# EAGLE board ProtoShield (EAGLE 5.01)
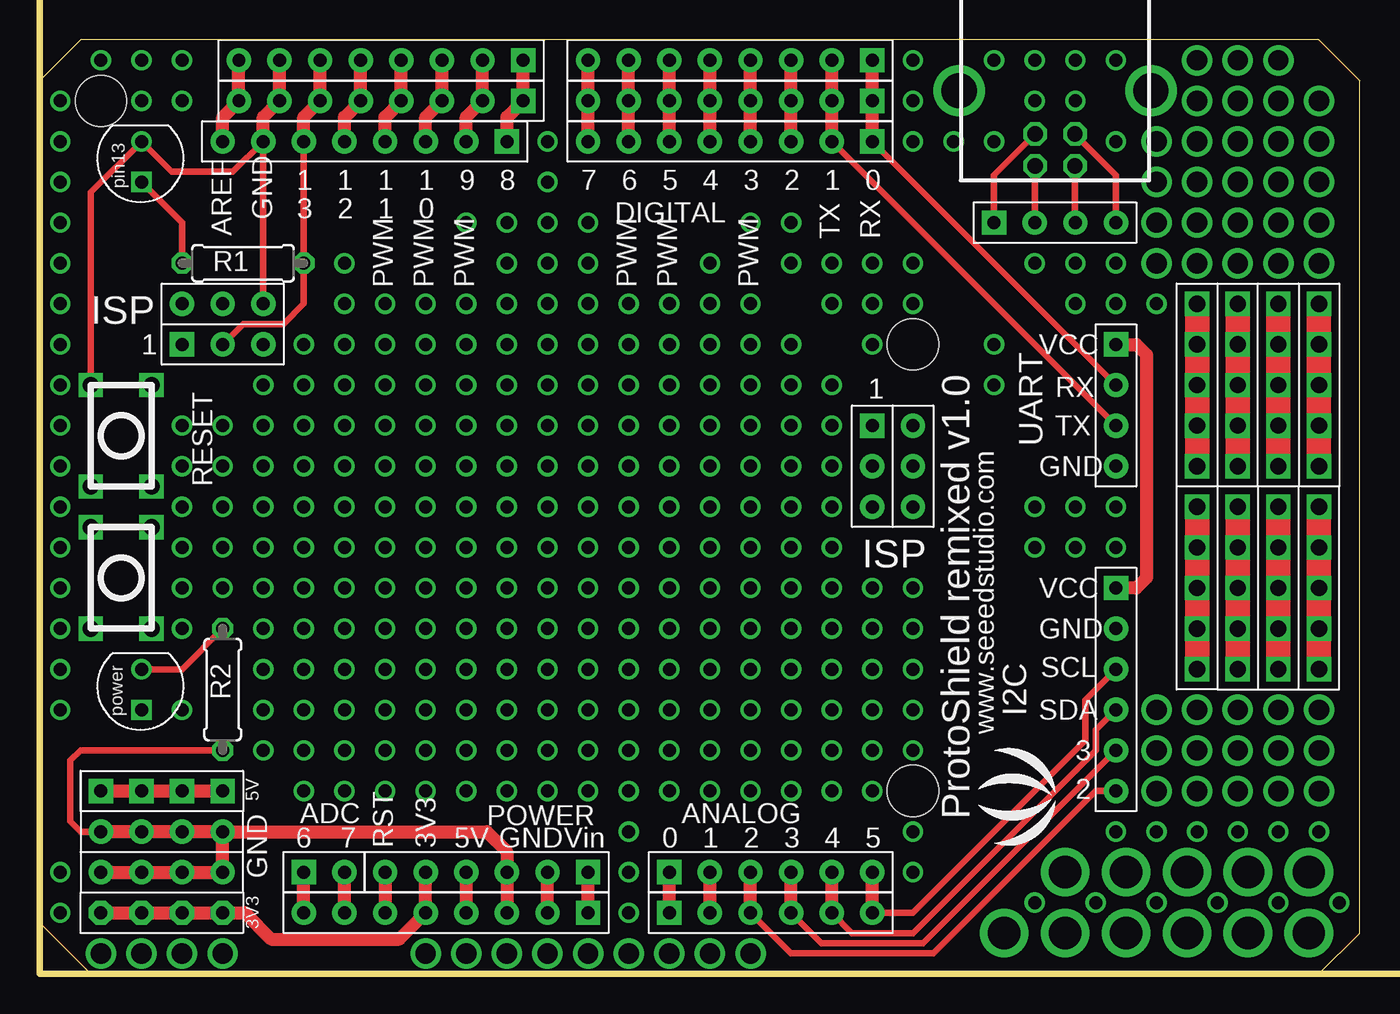
[diagram p0: board, top side]
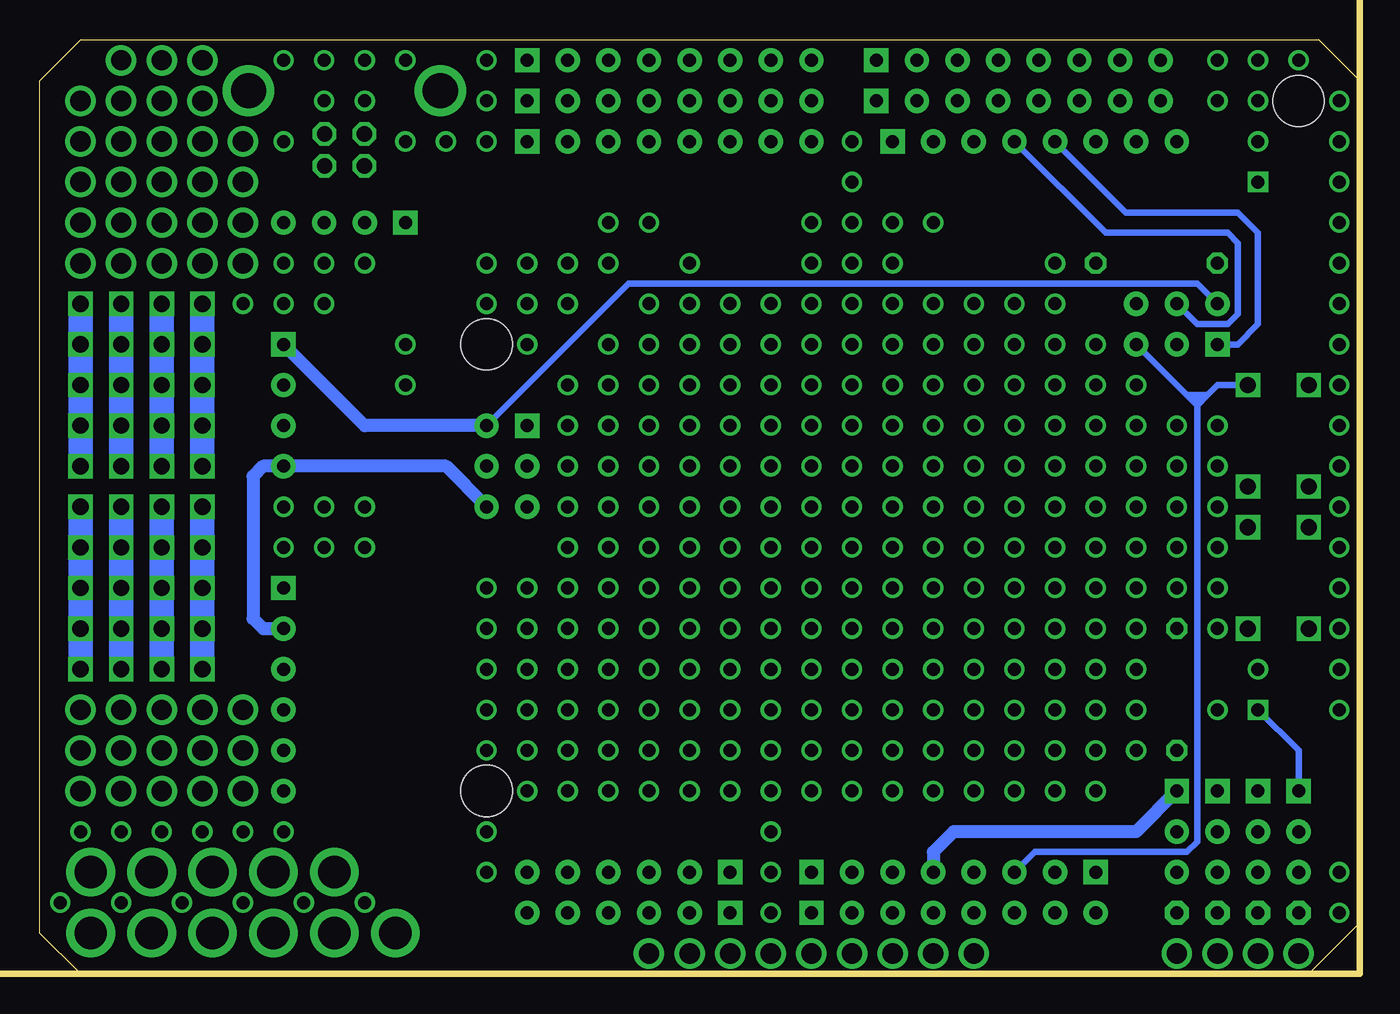
[diagram p1: board, bottom side, seen from below]

Size 82.55 x 58.42 mm. Coordinates in mm from the lower left corner, seen from the top.
Outline: 0,3.17 3.17,0 80.01,0 82.55,2.54 82.55,55.88 80.01,58.42 2.54,58.42 0,55.88 0,3.17
Copper layers (1*16): Top 0.035mm / dielectric 1.5mm / Bottom 0.035mm
Design rules "rule_manufactory *": minimum track width 0.1mm, minimum drill 0.3mm, track to track 6mil, track to pad 6mil, pad to pad 6mil, via to via 6mil, smd to smd 6mil, copper to edge 10mil, drill to drill 10mil, minimum pad ring 10mil, minimum via ring 6mil, stop-mask expansion 2mil, vias tented up to drill 25mil, thermal gap 10mil
Net classes: 0 default: width 0.003 mm, drill 0.254 mm, clearance 0.152 mm
Holes 3.2 mm at 3.81,54.61 54.61,11.43 54.61,11.43 54.61,39.37
Milling: 4 lines

## Footprints (pad centres in the part's own frame; a part is rotated, then mirrored left to right if it is on the bottom)
CK_1*2 = drill 0.813 pad 1.524 square: 1 0,1.27 | drill 0.813 pad 1.524 round: 2 0,-1.27
CK_1X4 = drill 0.813 pad 1.524 square: 1 0,3.81 | drill 0.813 pad 1.524 round: 2 0,1.27; 3 0,-1.27; 4 0,-3.81
CK_1*6 = drill 0.813 pad 1.524 square: 1 0,6.35 | drill 0.813 pad 1.524 round: 2 0,3.81; 3 0,1.27; 4 0,-1.27; 5 0,-3.81; 6 0,-6.35
CK_2X3 = drill 0.813 pad 1.524 square: 1 -1.27,2.54 | drill 0.813 pad 1.524 round: 2 -1.27,0; 3 -1.27,-2.54; 4 1.27,-2.54; 5 1.27,0; 6 1.27,2.54
CK_1X8 = drill 0.813 pad 1.524 square: 1 0,8.89 | drill 0.813 pad 1.524 round: 2 0,6.35; 3 0,3.81; 4 0,1.27; 5 0,-1.27; 6 0,-3.81; 7 0,-6.35; 8 0,-8.89
0207/7 = drill 0.813 octagon: 1 -3.81,0; 2 3.81,0
PN61729 = drill 0.95 octagon: 1 1.25,4.71; 2 -1.25,4.71; 3 -1.25,2.71; 4 1.25,2.71 | drill 2.2 round: P$1 -6,0; P$2 6,0

## Placement (x,y rotation side)
ADC6_7  CK_12  [CK_1*2]  17.78,6.35 90 top
E$1  [CK_1X4]  63.5,46.99 90 top
E$2  [LOGO_SILK]  61.85,11.05 90 top
I2C  [CK_1*6]  67.31,17.78 0 top
ISP  CK_2X3  [CK_2X3]  53.34,31.75 0 top
ISP1  CK_2X3  [CK_2X3]  11.43,40.64 90 top
PB  CK_1X8  [CK_1X8]  21.34,54.61 270 top
PB1  CK_1X8  [CK_1X8]  20.32,52.07 270 top
PB2  CK_1X8  [CK_1X8]  21.34,57.15 270 top
PC  [CK_1*6]  45.72,6.35 90 top
PC1  [CK_1*6]  45.72,3.81 90 top
PD  CK_1X8  [CK_1X8]  43.18,54.61 270 top
PD1  CK_1X8  [CK_1X8]  43.18,52.07 270 top
PD2  CK_1X8  [CK_1X8]  43.18,57.15 270 top
PD3  CK_1X8  [CK_1X8]  25.4,3.81 270 top
POWER  [CK_1*6]  27.94,6.35 270 top
R1  [0207/7]  12.7,44.45 0 top
R2  [0207/7]  11.43,17.78 90 top
UART  [CK_1X4]  67.31,35.56 0 top
X4  [PN61729]  63.5,55.24 180 top

## Library data of the parts
ADC6_7 E$1 I2C ISP ISP1 PB PB1 PB2 PC PC1 PD PD1-PD3 POWER UART = CONNECTER
E$2 = logo
R1 R2 = ref-packages
X4 = SmartPrj

## Nets
3V3: PD3.5 POWER.5
5V: PD3.4 POWER.4
---: PD3.3 POWER.3 R2.1
GND: I2C.2 ISP.4 UART.4
LED+: R1.1
LED-: ISP1.4 PB1.7 PB2.7 PB.7
LED-1: R2.2
RST: ISP1.3 PD3.6 POWER.6
RX: PD1.1 PD2.1 PD.1 UART.2
S$1: E$1.2 X4.1
S$3: I2C.5 PC1.4 PC.4
S$4: I2C.6 PC1.3 PC.3
S$168: ISP1.2 PB1.6 PB2.6 PB.6 R1.2
S$169: PC1.2 PC.2
S$170: PC1.1 PC.1
S$171: PD3.1 POWER.1
S$172: PD3.2 POWER.2
S$174: ADC6_7.1 PD3.8
S$177: ADC6_7.2 PD3.7
S$179: PD1.4 PD2.4 PD.4
S$180: PD1.3 PD2.3 PD.3
S$181: PD1.5 PD2.5 PD.5
S$182: PD1.6 PD2.6 PD.6
S$183: PD1.7 PD2.7 PD.7
S$184: PD1.8 PD2.8 PD.8
S$185: PB1.1 PB2.1 PB.1
S$186: PB1.2 PB2.2 PB.2
S$187: PB1.3 PB2.3 PB.3
S$188: ISP1.5 PB1.4 PB2.4 PB.4
S$189: ISP1.1 PB1.5 PB2.5 PB.5
S$191: PB1.8 PB2.8 PB.8
S$237: E$1.3 X4.2
S$238: E$1.1 X4.4
S$239: E$1.4 X4.3
SCL: I2C.3 PC1.6 PC.6
SDA: I2C.4 PC1.5 PC.5
TX: PD1.2 PD2.2 PD.2 UART.3
VCC: I2C.1 ISP1.6 ISP.6 UART.1

## Tracks (layer width: path | path; a pad name or v marks a point on that pad's centre or on a via)
3V3  (via drill 0.81 pad 1.52)
  Top 0.813: POWER.5 PD3.5 22.48,2.16 14.48,2.16 12.83,3.81 v11.43,3.81 v8.89,3.81 v6.35,3.81 v3.81,3.81
5V  (via drill 0.81 pad 1.27, 0.81 pad 1.52)
  Top 0.813: POWER.4 PD3.4 | v11.43,11.43 v8.89,11.43 v6.35,11.43 v3.81,11.43
  Bottom 0.406: v3.81,11.43 3.81,13.97 v6.35,16.51
  Bottom 0.813: POWER.4 26.67,7.62 25.4,8.89 13.97,8.89 v11.43,11.43
---  (via drill 0.81 pad 1.52)
  Top 0.406: v3.81,8.89 2.54,8.89 1.91,9.53 1.91,13.34 2.54,13.97 R2.1
  Top 0.813: PD3.3 POWER.3 29.21,7.62 27.94,8.89 v11.43,8.89 | v3.81,6.35 v6.35,6.35 v8.89,6.35 v11.43,6.35 v11.43,8.89 | v3.81,8.89 v6.35,8.89 v8.89,8.89 v11.43,8.89
GND
  Bottom 0.813: I2C.2 68.58,21.59 69.22,22.23 69.22,31.11 68.58,31.75 UART.4 57.15,31.75 ISP.4
LED+  (via drill 0.81 pad 1.27)
  Top 0.406: R1.1 8.89,46.99 v6.35,49.53
LED-  (via drill 0.81 pad 1.27, 1.02 pad 1.52)
  Top 0.406: 11.43,50.16 8.26,50.16 v6.35,52.07 3.17,48.9 v3.17,36.83 v3.17,30.48 | 11.43,50.16 12.06,50.16 PB1.7 ISP1.4 | 11.43,50.16 10.79,50.16
  Top 0.813: PB1.7 13.97,53.59 PB.7 PB2.7
LED-1  (via drill 0.81 pad 1.27)
  Top 0.406: v6.35,19.05 8.89,19.05 R2.2
RST  (via drill 1.02 pad 1.52)
  Top 0.406: v6.99,36.83 v6.99,30.48
  Top 0.813: POWER.6 PD3.6
  Bottom 0.406: POWER.6 20.32,7.62 10.79,7.62 10.16,8.26 10.16,35.56 | 10.16,35.56 ISP1.3 | v6.99,36.83 8.89,36.83 9.53,36.2 | 9.53,36.2 10.16,36.2 10.16,35.56 | 10.16,35.56 9.53,36.2 | 9.53,36.2 10.79,36.2 10.16,35.56
RX
  Top 0.406: PD1.1 UART.2
  Top 0.813: PD1.1 PD.1 PD2.1
S$1
  Top 0.406: X4.1 62.25,47.01 E$1.2
S$2  (via drill 0.81 pad 1.27)
  other vias: 19.05,44.45
S$3
  Top 0.406: PC1.4 48.9,1.91 55.24,1.91 I2C.5
  Top 0.813: PC1.4 PC.4
S$4
  Top 0.406: PC1.3 46.99,1.27 55.88,1.27 66.04,11.43 I2C.6
  Top 0.813: PC1.3 PC.3
S$5  (via drill 0.81 pad 1.27)
  other vias: 13.97,34.29
S$6  (via drill 0.81 pad 1.27)
  other vias: 19.05,41.91
S$7  (via drill 0.81 pad 1.27)
  other vias: 21.59,41.91
S$8  (via drill 0.81 pad 1.27)
  other vias: 24.13,41.91
S$9  (via drill 0.81 pad 1.27)
  other vias: 26.67,41.91
S$10  (via drill 0.81 pad 1.27)
  other vias: 29.21,41.91
S$11  (via drill 0.81 pad 1.27)
  other vias: 31.75,41.91
S$12  (via drill 0.81 pad 1.27)
  other vias: 34.29,41.91
S$13  (via drill 0.81 pad 1.27)
  other vias: 36.83,41.91
S$14  (via drill 0.81 pad 1.27)
  other vias: 39.37,41.91
S$15  (via drill 0.81 pad 1.27)
  other vias: 49.53,11.43
S$16  (via drill 0.81 pad 1.27)
  other vias: 44.45,41.91
S$17  (via drill 0.81 pad 1.27)
  other vias: 46.99,39.37
S$18  (via drill 0.81 pad 1.27)
  other vias: 46.99,36.83
S$19  (via drill 0.81 pad 1.27)
  other vias: 44.45,36.83
S$20  (via drill 0.81 pad 1.27)
  other vias: 41.91,36.83
S$21  (via drill 0.81 pad 1.27)
  other vias: 39.37,36.83
S$22  (via drill 0.81 pad 1.27)
  other vias: 36.83,36.83
S$23  (via drill 0.81 pad 1.27)
  other vias: 34.29,36.83
S$24  (via drill 0.81 pad 1.27)
  other vias: 31.75,36.83
S$25  (via drill 0.81 pad 1.27)
  other vias: 29.21,36.83
S$26  (via drill 0.81 pad 1.27)
  other vias: 26.67,36.83
S$27  (via drill 0.81 pad 1.27)
  other vias: 24.13,36.83
S$28  (via drill 0.81 pad 1.27)
  other vias: 21.59,36.83
S$29  (via drill 0.81 pad 1.27)
  other vias: 19.05,36.83
S$30  (via drill 0.81 pad 1.27)
  other vias: 16.51,36.83
S$31  (via drill 0.81 pad 1.27)
  other vias: 21.59,39.37
S$32  (via drill 0.81 pad 1.27)
  other vias: 24.13,39.37
S$34  (via drill 0.81 pad 1.27)
  other vias: 26.67,39.37
S$35  (via drill 0.81 pad 1.27)
  other vias: 16.51,34.29
S$36  (via drill 0.81 pad 1.27)
  other vias: 19.05,34.29
S$37  (via drill 0.81 pad 1.27)
  other vias: 21.59,34.29
S$38  (via drill 0.81 pad 1.27)
  other vias: 24.13,34.29
S$39  (via drill 0.81 pad 1.27)
  other vias: 26.67,34.29
S$40  (via drill 0.81 pad 1.27)
  other vias: 29.21,34.29
S$41  (via drill 0.81 pad 1.27)
  other vias: 31.75,34.29
S$42  (via drill 0.81 pad 1.27)
  other vias: 34.29,34.29
S$43  (via drill 0.81 pad 1.27)
  other vias: 36.83,34.29
S$44  (via drill 0.81 pad 1.27)
  other vias: 39.37,34.29
S$45  (via drill 0.81 pad 1.27)
  other vias: 41.91,34.29
S$46  (via drill 0.81 pad 1.27)
  other vias: 44.45,34.29
S$47  (via drill 0.81 pad 1.27)
  other vias: 46.99,34.29
S$48  (via drill 0.81 pad 1.27)
  other vias: 46.99,31.75
S$49  (via drill 0.81 pad 1.27)
  other vias: 44.45,31.75
S$50  (via drill 0.81 pad 1.27)
  other vias: 41.91,31.75
S$51  (via drill 0.81 pad 1.27)
  other vias: 39.37,31.75
S$52  (via drill 0.81 pad 1.27)
  other vias: 36.83,31.75
S$53  (via drill 0.81 pad 1.27)
  other vias: 34.29,31.75
S$54  (via drill 0.81 pad 1.27)
  other vias: 31.75,31.75
S$55  (via drill 0.81 pad 1.27)
  other vias: 29.21,31.75
S$56  (via drill 0.81 pad 1.27)
  other vias: 26.67,31.75
S$57  (via drill 0.81 pad 1.27)
  other vias: 24.13,31.75
S$58  (via drill 0.81 pad 1.27)
  other vias: 21.59,31.75
S$59  (via drill 0.81 pad 1.27)
  other vias: 19.05,31.75
S$60  (via drill 0.81 pad 1.27)
  other vias: 16.51,31.75
S$61  (via drill 0.81 pad 1.27)
  other vias: 29.21,46.99
S$62  (via drill 0.81 pad 1.27)
  other vias: 31.75,52.07
S$63  (via drill 0.81 pad 1.27)
  other vias: 34.29,46.99
S$64  (via drill 0.81 pad 1.27)
  other vias: 36.83,39.37
S$65  (via drill 0.81 pad 1.27)
  other vias: 16.51,29.21
S$66  (via drill 0.81 pad 1.27)
  other vias: 19.05,29.21
S$67  (via drill 0.81 pad 1.27)
  other vias: 21.59,29.21
S$68  (via drill 0.81 pad 1.27)
  other vias: 24.13,29.21
S$69  (via drill 0.81 pad 1.27)
  other vias: 26.67,29.21
S$70  (via drill 0.81 pad 1.27)
  other vias: 29.21,29.21
S$71  (via drill 0.81 pad 1.27)
  other vias: 31.75,29.21
S$72  (via drill 0.81 pad 1.27)
  other vias: 34.29,29.21
S$73  (via drill 0.81 pad 1.27)
  other vias: 36.83,29.21
S$74  (via drill 0.81 pad 1.27)
  other vias: 39.37,29.21
S$75  (via drill 0.81 pad 1.27)
  other vias: 41.91,29.21
S$76  (via drill 0.81 pad 1.27)
  other vias: 44.45,29.21
S$77  (via drill 0.81 pad 1.27)
  other vias: 46.99,29.21
S$78  (via drill 0.81 pad 1.27)
  other vias: 46.99,26.67
S$79  (via drill 0.81 pad 1.27)
  other vias: 44.45,26.67
S$80  (via drill 0.81 pad 1.27)
  other vias: 41.91,26.67
S$81  (via drill 0.81 pad 1.27)
  other vias: 39.37,26.67
S$82  (via drill 0.81 pad 1.27)
  other vias: 36.83,26.67
S$83  (via drill 0.81 pad 1.27)
  other vias: 34.29,26.67
S$84  (via drill 0.81 pad 1.27)
  other vias: 31.75,26.67
S$85  (via drill 0.81 pad 1.27)
  other vias: 29.21,26.67
S$86  (via drill 0.81 pad 1.27)
  other vias: 26.67,26.67
S$87  (via drill 0.81 pad 1.27)
  other vias: 24.13,26.67
S$88  (via drill 0.81 pad 1.27)
  other vias: 21.59,26.67
S$89  (via drill 0.81 pad 1.27)
  other vias: 19.05,26.67
S$90  (via drill 0.81 pad 1.27)
  other vias: 16.51,26.67
S$91  (via drill 0.81 pad 1.27)
  other vias: 39.37,39.37
S$92  (via drill 0.81 pad 1.27)
  other vias: 54.61,44.45
S$93  (via drill 0.81 pad 1.27)
  other vias: 44.45,39.37
S$94  (via drill 0.81 pad 1.27)
  other vias: 44.45,13.97
S$95  (via drill 0.81 pad 1.27)
  other vias: 16.51,24.13
S$96  (via drill 0.81 pad 1.27)
  other vias: 19.05,24.13
S$97  (via drill 0.81 pad 1.27)
  other vias: 21.59,24.13
S$98  (via drill 0.81 pad 1.27)
  other vias: 24.13,24.13
S$99  (via drill 0.81 pad 1.27)
  other vias: 26.67,24.13
S$100  (via drill 0.81 pad 1.27)
  other vias: 29.21,24.13
S$101  (via drill 0.81 pad 1.27)
  other vias: 31.75,24.13
S$102  (via drill 0.81 pad 1.27)
  other vias: 34.29,24.13
S$103  (via drill 0.81 pad 1.27)
  other vias: 36.83,24.13
S$104  (via drill 0.81 pad 1.27)
  other vias: 39.37,24.13
S$105  (via drill 0.81 pad 1.27)
  other vias: 41.91,24.13
S$106  (via drill 0.81 pad 1.27)
  other vias: 44.45,24.13
S$107  (via drill 0.81 pad 1.27)
  other vias: 46.99,24.13
S$109  (via drill 0.81 pad 1.27)
  other vias: 19.05,39.37
S$110  (via drill 0.81 pad 1.27)
  other vias: 16.51,21.59
S$111  (via drill 0.81 pad 1.27)
  other vias: 19.05,21.59
S$112  (via drill 0.81 pad 1.27)
  other vias: 21.59,21.59
S$113  (via drill 0.81 pad 1.27)
  other vias: 24.13,21.59
S$114  (via drill 0.81 pad 1.27)
  other vias: 26.67,21.59
S$115  (via drill 0.81 pad 1.27)
  other vias: 29.21,21.59
S$116  (via drill 0.81 pad 1.27)
  other vias: 31.75,21.59
S$117  (via drill 0.81 pad 1.27)
  other vias: 34.29,21.59
S$118  (via drill 0.81 pad 1.27)
  other vias: 36.83,21.59
S$119  (via drill 0.81 pad 1.27)
  other vias: 39.37,21.59
S$120  (via drill 0.81 pad 1.27)
  other vias: 41.91,21.59
S$121  (via drill 0.81 pad 1.27)
  other vias: 44.45,21.59
S$122  (via drill 0.81 pad 1.27)
  other vias: 46.99,21.59
S$123  (via drill 0.81 pad 1.27)
  other vias: 46.99,19.05
S$124  (via drill 0.81 pad 1.27)
  other vias: 44.45,19.05
S$125  (via drill 0.81 pad 1.27)
  other vias: 41.91,19.05
S$126  (via drill 0.81 pad 1.27)
  other vias: 39.37,19.05
S$127  (via drill 0.81 pad 1.27)
  other vias: 36.83,19.05
S$128  (via drill 0.81 pad 1.27)
  other vias: 34.29,19.05
S$129  (via drill 0.81 pad 1.27)
  other vias: 31.75,19.05
S$130  (via drill 0.81 pad 1.27)
  other vias: 29.21,19.05
S$131  (via drill 0.81 pad 1.27)
  other vias: 26.67,19.05
S$132  (via drill 0.81 pad 1.27)
  other vias: 24.13,19.05
S$133  (via drill 0.81 pad 1.27)
  other vias: 21.59,19.05
S$134  (via drill 0.81 pad 1.27)
  other vias: 19.05,19.05
S$135  (via drill 0.81 pad 1.27)
  other vias: 16.51,19.05
S$136  (via drill 0.81 pad 1.27)
  other vias: 29.21,44.45
S$137  (via drill 0.81 pad 1.27)
  other vias: 26.67,46.99
S$139  (via drill 0.81 pad 1.27)
  other vias: 31.75,49.53
S$140  (via drill 0.81 pad 1.27)
  other vias: 16.51,16.51
S$141  (via drill 0.81 pad 1.27)
  other vias: 19.05,16.51
S$142  (via drill 0.81 pad 1.27)
  other vias: 21.59,16.51
S$143  (via drill 0.81 pad 1.27)
  other vias: 24.13,16.51
S$144  (via drill 0.81 pad 1.27)
  other vias: 26.67,16.51
S$145  (via drill 0.81 pad 1.27)
  other vias: 29.21,16.51
S$146  (via drill 0.81 pad 1.27)
  other vias: 31.75,16.51
S$147  (via drill 0.81 pad 1.27)
  other vias: 34.29,16.51
S$148  (via drill 0.81 pad 1.27)
  other vias: 36.83,16.51
S$149  (via drill 0.81 pad 1.27)
  other vias: 39.37,16.51
S$150  (via drill 0.81 pad 1.27)
  other vias: 41.91,16.51
S$151  (via drill 0.81 pad 1.27)
  other vias: 44.45,16.51
S$152  (via drill 0.81 pad 1.27)
  other vias: 46.99,16.51
S$153  (via drill 0.81 pad 1.27)
  other vias: 46.99,13.97
S$154  (via drill 0.81 pad 1.27)
  other vias: 34.29,11.43
S$155  (via drill 0.81 pad 1.27)
  other vias: 41.91,13.97
S$156  (via drill 0.81 pad 1.27)
  other vias: 39.37,13.97
S$157  (via drill 0.81 pad 1.27)
  other vias: 36.83,13.97
S$158  (via drill 0.81 pad 1.27)
  other vias: 34.29,13.97
S$159  (via drill 0.81 pad 1.27)
  other vias: 31.75,13.97
S$160  (via drill 0.81 pad 1.27)
  other vias: 29.21,13.97
S$161  (via drill 0.81 pad 1.27)
  other vias: 26.67,13.97
S$162  (via drill 0.81 pad 1.27)
  other vias: 24.13,13.97
S$163  (via drill 0.81 pad 1.27)
  other vias: 21.59,13.97
S$164  (via drill 0.81 pad 1.27)
  other vias: 19.05,13.97
S$165  (via drill 0.81 pad 1.27)
  other vias: 31.75,11.43
S$166  (via drill 0.81 pad 1.27)
  other vias: 34.29,44.45
S$167  (via drill 0.81 pad 1.27)
  other vias: 41.91,39.37
S$168
  Top 0.406: PB1.6 R1.2 16.51,41.91 15.24,40.64 12.7,40.64 ISP1.2
  Top 0.813: PB2.6 PB.6 16.51,53.59 PB1.6
S$169
  Top 0.813: PC1.2 PC.2
S$170
  Top 0.813: PC1.1 PC.1
S$171
  Top 0.813: PD3.1 POWER.1
S$172
  Top 0.813: PD3.2 POWER.2
S$174
  Top 0.813: PD3.8 ADC6_7.1
S$175  (via drill 0.81 pad 1.27)
  other vias: 44.45,11.43
S$176  (via drill 0.81 pad 1.27)
  other vias: 16.51,13.97
S$177
  Top 0.813: PD3.7 ADC6_7.2
S$178  (via drill 0.81 pad 1.27)
  other vias: 29.21,39.37
S$179
  Top 0.813: PD1.4 PD.4 PD2.4
S$180
  Top 0.813: PD1.3 PD.3 PD2.3
S$181
  Top 0.813: PD1.5 PD.5 PD2.5
S$182
  Top 0.813: PD2.6 PD.6 PD1.6
S$183
  Top 0.813: PD1.7 PD.7 PD2.7
S$184
  Top 0.813: PD2.8 PD.8 PD1.8
S$185
  Top 0.813: PB1.1 29.21,53.59 PB.1 PB2.1
S$186
  Top 0.813: PB1.2 26.67,53.59 PB.2 PB2.2
S$187
  Top 0.813: PB1.3 24.13,53.59 PB.3 PB2.3
S$188
  Top 0.813: PB2.4 PB.4 21.59,53.59 PB1.4
  Bottom 0.406: PB1.4 15.88,46.35 8.26,46.35 7.62,45.72 7.62,41.27 8.26,40.64 10.16,40.64 ISP1.5
S$189
  Top 0.813: PB1.5 19.05,53.59 PB.5 PB2.5
  Bottom 0.406: ISP1.1 7.62,39.37 6.35,40.64 6.35,46.35 7.62,47.62 14.61,47.62 PB1.5
S$190  (via drill 0.81 pad 1.27)
  other vias: 31.75,46.99
S$191
  Top 0.813: PB1.8 11.43,53.59 PB.8 PB2.8
S$192  (via drill 0.81 pad 1.27)
  other vias: 34.29,39.37
S$193  (via drill 0.81 pad 1.27)
  other vias: 41.91,41.91
S$194  (via drill 0.81 pad 1.27)
  other vias: 36.83,3.81
S$195  (via drill 0.81 pad 1.27)
  other vias: 31.75,44.45
S$196  (via drill 0.81 pad 1.27)
  other vias: 41.91,44.45
S$197  (via drill 0.81 pad 1.27)
  other vias: 36.83,6.35
S$198  (via drill 0.81 pad 1.27)
  other vias: 31.75,39.37
S$199  (via drill 0.81 pad 1.27)
  other vias: 44.45,46.99
S$200  (via drill 0.81 pad 1.27)
  other vias: 41.91,11.43
S$201  (via drill 0.81 pad 1.27)
  other vias: 46.99,46.99
S$202  (via drill 0.81 pad 1.27)
  other vias: 39.37,11.43
S$203  (via drill 0.81 pad 1.27)
  other vias: 46.99,44.45
S$204  (via drill 0.81 pad 1.27)
  other vias: 36.83,8.89
S$205  (via drill 0.81 pad 1.27)
  other vias: 49.53,41.91
S$206  (via drill 0.81 pad 1.27)
  other vias: 36.83,11.43
S$207  (via drill 0.81 pad 1.27)
  other vias: 49.53,44.45
S$208  (via drill 0.81 pad 1.27)
  other vias: 26.67,11.43
S$209  (via drill 0.81 pad 1.27)
  other vias: 52.07,44.45
S$210  (via drill 0.81 pad 1.27)
  other vias: 52.07,41.91
S$211  (via drill 0.81 pad 1.27)
  other vias: 54.61,13.97
S$212  (via drill 0.81 pad 1.27)
  other vias: 52.07,11.43
S$213  (via drill 0.81 pad 1.27)
  other vias: 59.69,39.37
S$214  (via drill 0.81 pad 1.27)
  other vias: 49.53,36.83
S$215  (via drill 0.81 pad 1.27)
  other vias: 52.07,13.97
S$216  (via drill 0.81 pad 1.27)
  other vias: 54.61,16.51
S$217  (via drill 0.81 pad 1.27)
  other vias: 54.61,19.05
S$218  (via drill 0.81 pad 1.27)
  other vias: 52.07,16.51
S$219  (via drill 0.81 pad 1.27)
  other vias: 49.53,34.29
S$220  (via drill 0.81 pad 1.27)
  other vias: 49.53,31.75
S$221  (via drill 0.81 pad 1.27)
  other vias: 52.07,19.05
S$222  (via drill 0.81 pad 1.27)
  other vias: 54.61,21.59
S$223  (via drill 0.81 pad 1.27)
  other vias: 62.23,44.45
S$224  (via drill 0.81 pad 1.27)
  other vias: 52.07,21.59
S$225  (via drill 0.81 pad 1.27)
  other vias: 49.53,29.21
S$226  (via drill 0.81 pad 1.27)
  other vias: 49.53,26.67
S$227  (via drill 0.81 pad 1.27)
  other vias: 52.07,24.13
S$228  (via drill 0.81 pad 1.27)
  other vias: 49.53,24.13
S$229  (via drill 0.81 pad 1.27)
  other vias: 49.53,21.59
S$230  (via drill 0.81 pad 1.27)
  other vias: 49.53,19.05
S$231  (via drill 0.81 pad 1.27)
  other vias: 49.53,16.51
S$232  (via drill 0.81 pad 1.27)
  other vias: 49.53,13.97
S$233  (via drill 0.81 pad 1.27)
  other vias: 46.99,11.43
S$234  (via drill 0.81 pad 1.27)
  other vias: 16.51,39.37
S$235  (via drill 0.81 pad 1.27)
  other vias: 13.97,36.83
S$236  (via drill 0.81 pad 1.27)
  other vias: 13.97,16.51
S$237
  Top 0.406: X4.2 64.75,47.01 E$1.3
S$238
  Top 0.406: X4.4 59.69,49.98 E$1.1
S$239
  Top 0.406: X4.3 67.31,49.98 E$1.4
S$240  (via drill 0.81 pad 1.27)
  other vias: 13.97,31.75
S$241  (via drill 0.81 pad 1.27)
  other vias: 13.97,29.21
S$242  (via drill 0.81 pad 1.27)
  other vias: 13.97,26.67
S$243  (via drill 0.81 pad 1.27)
  other vias: 13.97,24.13
S$244  (via drill 0.81 pad 1.27)
  other vias: 13.97,21.59
S$245  (via drill 0.81 pad 1.27)
  other vias: 13.97,19.05
S$246  (via drill 0.81 pad 1.27)
  other vias: 13.97,13.97
S$247  (via drill 2.03 pad 2.54)
  other vias: 75.56,2.54
S$248  (via drill 1.27 pad 1.78)
  other vias: 80.01,16.51
S$249  (via drill 1.27 pad 1.78)
  other vias: 77.47,16.51
S$250  (via drill 1.27 pad 1.78)
  other vias: 74.93,16.51
S$251  (via drill 2.03 pad 2.54)
  other vias: 79.38,2.54
S$252  (via drill 1.02 pad 1.52)
  Top 1.524: v72.39,21.59 v72.39,24.13 v72.39,26.67 | v72.39,19.05 v72.39,29.21
  Bottom 1.524: v72.39,29.21 v72.39,21.59 | v72.39,21.59 v72.39,19.05 v72.39,21.59
S$253  (via drill 1.02 pad 1.52)
  Top 1.524: v74.93,21.59 v74.93,24.13 v74.93,26.67 | v74.93,29.21 v74.93,21.59 | v74.93,19.05 v74.93,21.59
  Bottom 1.524: v74.93,19.05 v74.93,29.21
S$254  (via drill 1.02 pad 1.52)
  Top 1.524: v77.47,21.59 v77.47,24.13 v77.47,26.67 | v77.47,19.05 v77.47,29.21
  Bottom 1.524: v77.47,21.59 v77.47,19.05 v77.47,21.59 | v77.47,29.21 v77.47,21.59
S$255  (via drill 2.03 pad 2.54)
  other vias: 79.38,6.35
S$256  (via drill 2.03 pad 2.54)
  other vias: 75.56,6.35
S$257  (via drill 2.03 pad 2.54)
  other vias: 64.14,2.54
S$258  (via drill 1.02 pad 1.52)
  Top 1.524: v80.01,21.59 v80.01,24.13 v80.01,26.67 | v80.01,29.21 v80.01,21.59 | v80.01,21.59 v80.01,19.05 v80.01,21.59
  Bottom 1.524: v80.01,19.05 v80.01,29.21
S$259  (via drill 1.02 pad 1.52)
  Top 1.524: v72.39,34.29 v72.39,36.83 v72.39,39.37 | v72.39,31.75 v72.39,41.91
  Bottom 1.524: v72.39,41.91 v72.39,34.29 v72.39,31.75
S$260  (via drill 1.02 pad 1.52)
  Top 1.524: v74.93,34.29 v74.93,36.83 v74.93,39.37 | v74.93,34.29 v74.93,31.75 v74.93,34.29 | v74.93,41.91 v74.93,34.29
  Bottom 1.524: v74.93,31.75 v74.93,41.91
S$261  (via drill 1.02 pad 1.52)
  Top 1.524: v77.47,34.29 v77.47,36.83 v77.47,39.37 | v77.47,31.75 v77.47,41.91
  Bottom 1.524: v77.47,41.91 v77.47,34.29 v77.47,31.75
S$262  (via drill 2.03 pad 2.54)
  other vias: 67.94,2.54
S$263  (via drill 2.03 pad 2.54)
  other vias: 71.75,2.54
S$264  (via drill 2.03 pad 2.54)
  other vias: 60.33,2.54
S$265  (via drill 0.81 pad 1.27)
  other vias: 64.77,44.45
S$266  (via drill 0.81 pad 1.27)
  other vias: 64.77,41.91
S$267  (via drill 0.81 pad 1.27)
  other vias: 67.31,26.67
S$268  (via drill 0.81 pad 1.27)
  other vias: 67.31,29.21
S$269  (via drill 1.02 pad 1.52)
  Top 1.524: v80.01,34.29 v80.01,36.83 v80.01,39.37 | v80.01,34.29 v80.01,31.75 v80.01,34.29 | v80.01,41.91 v80.01,34.29
  Bottom 1.524: v80.01,31.75 v80.01,41.91
S$270  (via drill 0.81 pad 1.27)
  other vias: 16.51,11.43
S$271  (via drill 0.81 pad 1.27)
  other vias: 19.05,11.43
S$272  (via drill 0.81 pad 1.27)
  other vias: 21.59,11.43
S$273  (via drill 0.81 pad 1.27)
  other vias: 24.13,11.43
S$274  (via drill 1.02 pad 1.52)
  other vias: 3.17,27.94
S$275  (via drill 1.02 pad 1.52)
  other vias: 6.99,27.94
S$276  (via drill 1.02 pad 1.52)
  other vias: 3.17,21.59
S$277  (via drill 1.02 pad 1.52)
  other vias: 6.99,21.59
S$278  (via drill 0.81 pad 1.27)
  other vias: 29.21,11.43
S$279  (via drill 0.81 pad 1.27)
  other vias: 62.23,29.21
S$280  (via drill 0.81 pad 1.27)
  other vias: 64.77,26.67
S$281  (via drill 0.81 pad 1.27)
  other vias: 64.77,29.21
S$282  (via drill 0.81 pad 1.27)
  other vias: 62.23,26.67
S$283  (via drill 0.81 pad 1.27)
  other vias: 52.07,39.37
S$284  (via drill 0.81 pad 1.27)
  other vias: 54.61,41.91
S$285  (via drill 1.27 pad 1.78)
  other vias: 72.39,16.51
S$286  (via drill 1.27 pad 1.78)
  other vias: 69.85,16.51
S$287  (via drill 1.27 pad 1.78)
  other vias: 69.85,13.97
S$288  (via drill 1.27 pad 1.78)
  other vias: 72.39,13.97
S$289  (via drill 1.27 pad 1.78)
  other vias: 74.93,13.97
S$290  (via drill 1.27 pad 1.78)
  other vias: 77.47,13.97
S$291  (via drill 1.27 pad 1.78)
  other vias: 80.01,13.97
S$292  (via drill 1.27 pad 1.78)
  other vias: 80.01,11.43
S$293  (via drill 1.27 pad 1.78)
  other vias: 77.47,11.43
S$294  (via drill 1.27 pad 1.78)
  other vias: 74.93,11.43
S$295  (via drill 1.27 pad 1.78)
  other vias: 72.39,11.43
S$296  (via drill 1.27 pad 1.78)
  other vias: 69.85,11.43
S$297  (via drill 2.03 pad 2.54)
  other vias: 64.14,6.35
S$298  (via drill 0.81 pad 1.27)
  other vias: 67.31,44.45
S$299  (via drill 2.03 pad 2.54)
  other vias: 67.94,6.35
S$300  (via drill 2.03 pad 2.54)
  other vias: 71.75,6.35
S$302  (via drill 0.81 pad 1.27)
  other vias: 59.69,36.83
S$303  (via drill 0.81 pad 1.27)
  other vias: 54.61,24.13
S$308  (via drill 0.81 pad 1.27)
  other vias: 8.89,57.15
S$330  (via drill 0.81 pad 1.27)
  other vias: 6.35,57.15
S$331  (via drill 0.81 pad 1.27)
  other vias: 69.85,41.91
S$332  (via drill 0.81 pad 1.27)
  other vias: 3.81,57.15
S$333  (via drill 0.81 pad 1.27)
  other vias: 8.89,54.61
S$334  (via drill 0.81 pad 1.27)
  other vias: 6.35,54.61
S$335  (via drill 0.81 pad 1.27)
  other vias: 1.27,52.07
S$336  (via drill 0.81 pad 1.27)
  other vias: 1.27,54.61
S$337  (via drill 0.81 pad 1.27)
  other vias: 1.27,49.53
S$338  (via drill 0.81 pad 1.27)
  other vias: 1.27,46.99
S$339  (via drill 0.81 pad 1.27)
  other vias: 1.27,44.45
S$340  (via drill 0.81 pad 1.27)
  other vias: 1.27,41.91
S$341  (via drill 0.81 pad 1.27)
  other vias: 1.27,39.37
S$342  (via drill 0.81 pad 1.27)
  other vias: 1.27,36.83
S$343  (via drill 0.81 pad 1.27)
  other vias: 1.27,34.29
S$344  (via drill 0.81 pad 1.27)
  other vias: 1.27,31.75
S$345  (via drill 0.81 pad 1.27)
  other vias: 1.27,29.21
S$346  (via drill 0.81 pad 1.27)
  other vias: 1.27,26.67
S$347  (via drill 0.81 pad 1.27)
  other vias: 1.27,24.13
S$348  (via drill 0.81 pad 1.27)
  other vias: 1.27,21.59
S$349  (via drill 0.81 pad 1.27)
  other vias: 1.27,19.05
S$350  (via drill 0.81 pad 1.27)
  other vias: 1.27,16.51
S$351  (via drill 0.81 pad 1.27)
  other vias: 1.27,6.35
S$352  (via drill 0.81 pad 1.27)
  other vias: 1.27,3.81
S$353  (via drill 0.81 pad 1.27)
  other vias: 11.43,24.13
S$354  (via drill 0.81 pad 1.27)
  other vias: 11.43,26.67
S$355  (via drill 0.81 pad 1.27)
  other vias: 11.43,29.21
S$356  (via drill 0.81 pad 1.27)
  other vias: 11.43,31.75
S$357  (via drill 0.81 pad 1.27)
  other vias: 11.43,34.29
S$358  (via drill 0.81 pad 1.27)
  other vias: 8.89,34.29
S$359  (via drill 0.81 pad 1.27)
  other vias: 8.89,31.75
S$360  (via drill 0.81 pad 1.27)
  other vias: 8.89,29.21
S$361  (via drill 0.81 pad 1.27)
  other vias: 8.89,26.67
S$362  (via drill 0.81 pad 1.27)
  other vias: 8.89,24.13
S$363  (via drill 0.81 pad 1.27)
  other vias: 8.89,21.59
S$364  (via drill 0.81 pad 1.27)
  other vias: 8.89,16.51
S$365  (via drill 0.81 pad 1.27)
  other vias: 54.61,6.35
S$366  (via drill 0.81 pad 1.27)
  other vias: 54.61,8.89
S$367  (via drill 0.81 pad 1.27)
  other vias: 54.61,52.07
S$368  (via drill 0.81 pad 1.27)
  other vias: 54.61,54.61
S$369  (via drill 0.81 pad 1.27)
  other vias: 54.61,57.15
S$370  (via drill 0.81 pad 1.27)
  other vias: 57.15,52.07
S$371  (via drill 0.81 pad 1.27)
  other vias: 59.69,52.07
S$372  (via drill 0.81 pad 1.27)
  other vias: 62.23,54.61
S$373  (via drill 0.81 pad 1.27)
  other vias: 62.23,57.15
S$374  (via drill 0.81 pad 1.27)
  other vias: 59.69,57.15
S$375  (via drill 0.81 pad 1.27)
  other vias: 64.77,54.61
S$376  (via drill 0.81 pad 1.27)
  other vias: 64.77,57.15
S$377  (via drill 0.81 pad 1.27)
  other vias: 67.31,57.15
S$378  (via drill 0.81 pad 1.27)
  other vias: 67.31,52.07
S$379  (via drill 1.27 pad 1.78)
  other vias: 80.01,44.45
S$380  (via drill 1.27 pad 1.78)
  other vias: 80.01,46.99
S$381  (via drill 1.27 pad 1.78)
  other vias: 80.01,49.53
S$382  (via drill 1.27 pad 1.78)
  other vias: 80.01,52.07
S$383  (via drill 1.27 pad 1.78)
  other vias: 80.01,54.61
S$384  (via drill 1.27 pad 1.78)
  other vias: 77.47,54.61
S$385  (via drill 1.27 pad 1.78)
  other vias: 77.47,52.07
S$386  (via drill 1.27 pad 1.78)
  other vias: 77.47,49.53
S$387  (via drill 1.27 pad 1.78)
  other vias: 77.47,46.99
S$388  (via drill 1.27 pad 1.78)
  other vias: 77.47,44.45
S$389  (via drill 1.27 pad 1.78)
  other vias: 74.93,44.45
S$390  (via drill 1.27 pad 1.78)
  other vias: 74.93,46.99
S$391  (via drill 1.27 pad 1.78)
  other vias: 74.93,49.53
S$392  (via drill 1.27 pad 1.78)
  other vias: 74.93,52.07
S$393  (via drill 1.27 pad 1.78)
  other vias: 74.93,54.61
S$394  (via drill 1.27 pad 1.78)
  other vias: 74.93,57.15
S$395  (via drill 1.27 pad 1.78)
  other vias: 77.47,57.15
S$396  (via drill 1.27 pad 1.78)
  other vias: 72.39,57.15
S$397  (via drill 1.27 pad 1.78)
  other vias: 72.39,54.61
S$398  (via drill 1.27 pad 1.78)
  other vias: 72.39,52.07
S$399  (via drill 1.27 pad 1.78)
  other vias: 72.39,49.53
S$400  (via drill 1.27 pad 1.78)
  other vias: 72.39,46.99
S$401  (via drill 1.27 pad 1.78)
  other vias: 72.39,44.45
S$402  (via drill 1.27 pad 1.78)
  other vias: 69.85,44.45
S$403  (via drill 1.27 pad 1.78)
  other vias: 69.85,46.99
S$404  (via drill 1.27 pad 1.78)
  other vias: 69.85,49.53
S$405  (via drill 1.27 pad 1.78)
  other vias: 69.85,52.07
S$406  (via drill 0.81 pad 1.27)
  other vias: 69.85,8.89
S$407  (via drill 0.81 pad 1.27)
  other vias: 72.39,8.89
S$408  (via drill 0.81 pad 1.27)
  other vias: 74.93,8.89
S$409  (via drill 0.81 pad 1.27)
  other vias: 77.47,8.89
S$410  (via drill 0.81 pad 1.27)
  other vias: 80.01,8.89
S$411  (via drill 0.81 pad 1.27)
  other vias: 67.31,8.89
S$412  (via drill 0.81 pad 1.27)
  other vias: 73.66,4.45
S$413  (via drill 0.81 pad 1.27)
  other vias: 69.85,4.45
S$414  (via drill 0.81 pad 1.27)
  other vias: 66.04,4.45
S$415  (via drill 0.81 pad 1.27)
  other vias: 77.47,4.45
S$416  (via drill 0.81 pad 1.27)
  other vias: 81.28,4.45
S$417  (via drill 0.81 pad 1.27)
  other vias: 62.23,4.45
S$418  (via drill 1.27 pad 1.78)
  other vias: 44.45,1.27
S$419  (via drill 1.27 pad 1.78)
  other vias: 41.91,1.27
S$420  (via drill 1.27 pad 1.78)
  other vias: 39.37,1.27
S$421  (via drill 1.27 pad 1.78)
  other vias: 36.83,1.27
S$422  (via drill 1.27 pad 1.78)
  other vias: 34.29,1.27
S$423  (via drill 1.27 pad 1.78)
  other vias: 31.75,1.27
S$424  (via drill 1.27 pad 1.78)
  other vias: 29.21,1.27
S$425  (via drill 1.27 pad 1.78)
  other vias: 26.67,1.27
S$426  (via drill 1.27 pad 1.78)
  other vias: 24.13,1.27
S$427  (via drill 1.27 pad 1.78)
  other vias: 11.43,1.27
S$428  (via drill 1.27 pad 1.78)
  other vias: 8.89,1.27
S$429  (via drill 1.27 pad 1.78)
  other vias: 6.35,1.27
S$430  (via drill 1.27 pad 1.78)
  other vias: 3.81,1.27
S$431  (via drill 0.81 pad 1.27)
  other vias: 67.31,41.91
SCL
  Top 0.406: PC1.6 54.61,3.81 65.41,14.61 65.41,17.14 I2C.3
  Top 0.813: PC1.6 PC.6
SDA
  Top 0.406: PC1.5 50.8,2.54 54.61,2.54 66.04,13.97 66.04,15.24 I2C.4
  Top 0.813: PC1.5 PC.5
TX
  Top 0.406: PD1.2 UART.3
  Top 0.813: PD2.2 PD.2 PD1.2
VCC
  Top 0.813: I2C.1 68.58,24.13 69.22,24.77 69.22,38.73 68.58,39.37 UART.1
  Bottom 0.406: ISP.6 45.72,43.18 10.16,43.18 ISP1.6
  Bottom 0.813: ISP.6 62.23,34.29 UART.1

## Text on the board
tPlace: pin13 | 1 | 1 | 1 | 1 | 9 | 8 | 7 | 6 | 5 | 4 | 3 | 2 | 1 | 0 | GND | 3 | 2 | 1 | 0 | DIGITAL | AREF | TX | RX | PWM | PWM | PWM | PWM | PWM | PWM | ISP | 1 | VCC | 1 | RX | TX | GND | RESET | VCC | GND | SCL | power | SDA | www.seeedstudio.com | 3 | 5V | 2 | ProtoShield remixed v1.0 | ADC | POWER | ANALOG | 6 | 7 | RST | 3V3 | 5V | GND | Vin | 0 | 1 | 2 | 3 | 4 | 5 | GND | 3V3
Reference: USB_B Port | Free Drills 50 mil | 13 LED | Serial Port | RESET BUTTON | breadboard style | free button | POWER Indication | Free Drills 50 mil | 5V | I2C Port | GND | 3V3 | Free Drills 80 mil | Free Drills 32 mil